# EAGLE board diag (EAGLE 6.2)

Size 50 x 50 mm. Coordinates in mm from the lower left corner, seen from the top.
Outline: 35.91,49.41 0.59,14.09 arc45 0,12.67 0,4 arc90 4,0 13.16,0 arc45 14.59,0.6 49.42,35.92 arc45 50,37.32 50,46 arc90 46,50 37.33,50 arc45 35.91,49.41
Copper layers (1*16): Top 0.035mm / dielectric 1.5mm / Bottom 0.035mm
Design rules: minimum track width 10mil, minimum drill 24mil, track to track 8mil, track to pad 8mil, pad to pad 8mil, via to via 8mil, smd to smd 8mil, copper to edge 40mil, drill to drill 8mil, minimum pad ring 10mil, minimum via ring 8mil, stop-mask expansion 4mil, vias tented up to drill 0mil, thermal gap 10mil
Holes 4 mm at 4,4 46,46

## Footprints (pad centres in the part's own frame; a part is rotated, then mirrored left to right if it is on the bottom)
SO14 = smd 0.61 x 2.21: 1 -3.81,-2.603; 2 -2.54,-2.603; 3 -1.27,-2.603; 4 0,-2.603; 5 1.27,-2.603; 6 2.54,-2.603; 7 3.81,-2.603; 8 3.81,2.603; 9 2.54,2.603; 10 1.27,2.603; 11 0,2.603; 12 -1.27,2.603; 13 -2.54,2.603; 14 -3.81,2.603
LED3MM = drill 0.813 octagon: A -1.27,0; K 1.27,0
NICHICON_10X30 = drill 1.2 pad 2.54 octagon: P$1 3.23,-1.75 | drill 1.2 pad 2.54: P$2 8.77,-1.75
CR2032H = drill 1.118 pad 2.54 octagon: + 5.08,10.795; +@1 -5.08,10.795; - 0,-6.985

## Placement (x,y rotation side)
E$1  [SO14]  13,34.5 225 top
E$2  [LED3MM]  9.1,5.9 45 top
E$3  [LED3MM]  12.3,9.1 45 top
E$4  [LED3MM]  15.5,12.3 45 top
E$5  [LED3MM]  18.7,15.5 45 top
E$6  [LED3MM]  21.9,18.7 45 top
E$7  [LED3MM]  25.1,21.9 45 top
E$8  [LED3MM]  28.3,25.1 45 top
E$9  [LED3MM]  31.5,28.3 45 top
E$10  [LED3MM]  34.7,31.5 45 top
E$11  [LED3MM]  37.9,34.7 45 top
E$12  [LED3MM]  41.1,37.9 45 top
E$13  [LED3MM]  44.3,41.1 45 top
E$14  [LED3MM]  47.5,37.9 45 top
E$15  [LED3MM]  41.1,44.3 45 top
E$16  [LED3MM]  37.9,47.5 45 top
E$17  [LED3MM]  12.3,2.7 45 top
E$18  [LED3MM]  5.9,9.1 45 top
E$19  [LED3MM]  9.1,12.3 45 top
E$20  [LED3MM]  12.3,15.5 45 top
E$21  [LED3MM]  15.5,18.7 45 top
E$22  [LED3MM]  18.7,21.9 45 top
E$23  [LED3MM]  21.9,25.1 45 top
E$24  [LED3MM]  25.1,28.3 45 top
E$25  [LED3MM]  28.3,31.5 45 top
E$26  [LED3MM]  31.5,34.7 45 top
E$27  [LED3MM]  34.7,37.9 45 top
E$28  [LED3MM]  37.9,41.1 45 top
E$29  [LED3MM]  34.7,44.3 45 top
E$30  [LED3MM]  31.5,41.1 45 top
E$31  [LED3MM]  28.3,37.9 45 top
E$32  [LED3MM]  25.1,34.7 45 top
E$33  [LED3MM]  21.9,31.5 45 top
E$34  [LED3MM]  18.7,28.3 45 top
E$35  [LED3MM]  15.5,25.1 45 top
E$36  [LED3MM]  12.3,21.9 45 top
E$37  [LED3MM]  9.1,18.7 45 top
E$38  [LED3MM]  5.9,15.5 45 top
E$39  [LED3MM]  2.7,12.3 45 top
E$40  [LED3MM]  44.3,34.7 45 top
E$41  [LED3MM]  41.1,31.5 45 top
E$42  [LED3MM]  37.9,28.3 45 top
E$43  [LED3MM]  34.7,25.1 45 top
E$44  [LED3MM]  31.5,21.9 45 top
E$45  [LED3MM]  28.3,18.7 45 top
E$46  [LED3MM]  25.1,15.5 45 top
E$47  [LED3MM]  21.9,12.3 45 top
E$48  [LED3MM]  18.7,9.1 45 top
E$49  [LED3MM]  15.5,5.9 45 top
E$50  [NICHICON_10X30]  22.5,9.5 315 top
E$51  [CR2032H]  11,11 315 top

## Library data of the parts
E$1 = avr-5-4.16
E$2-E$49 = 0-svo
E$50 = Mrule
E$51 = battery